# Allegro board VGroupV_PCB2.brd
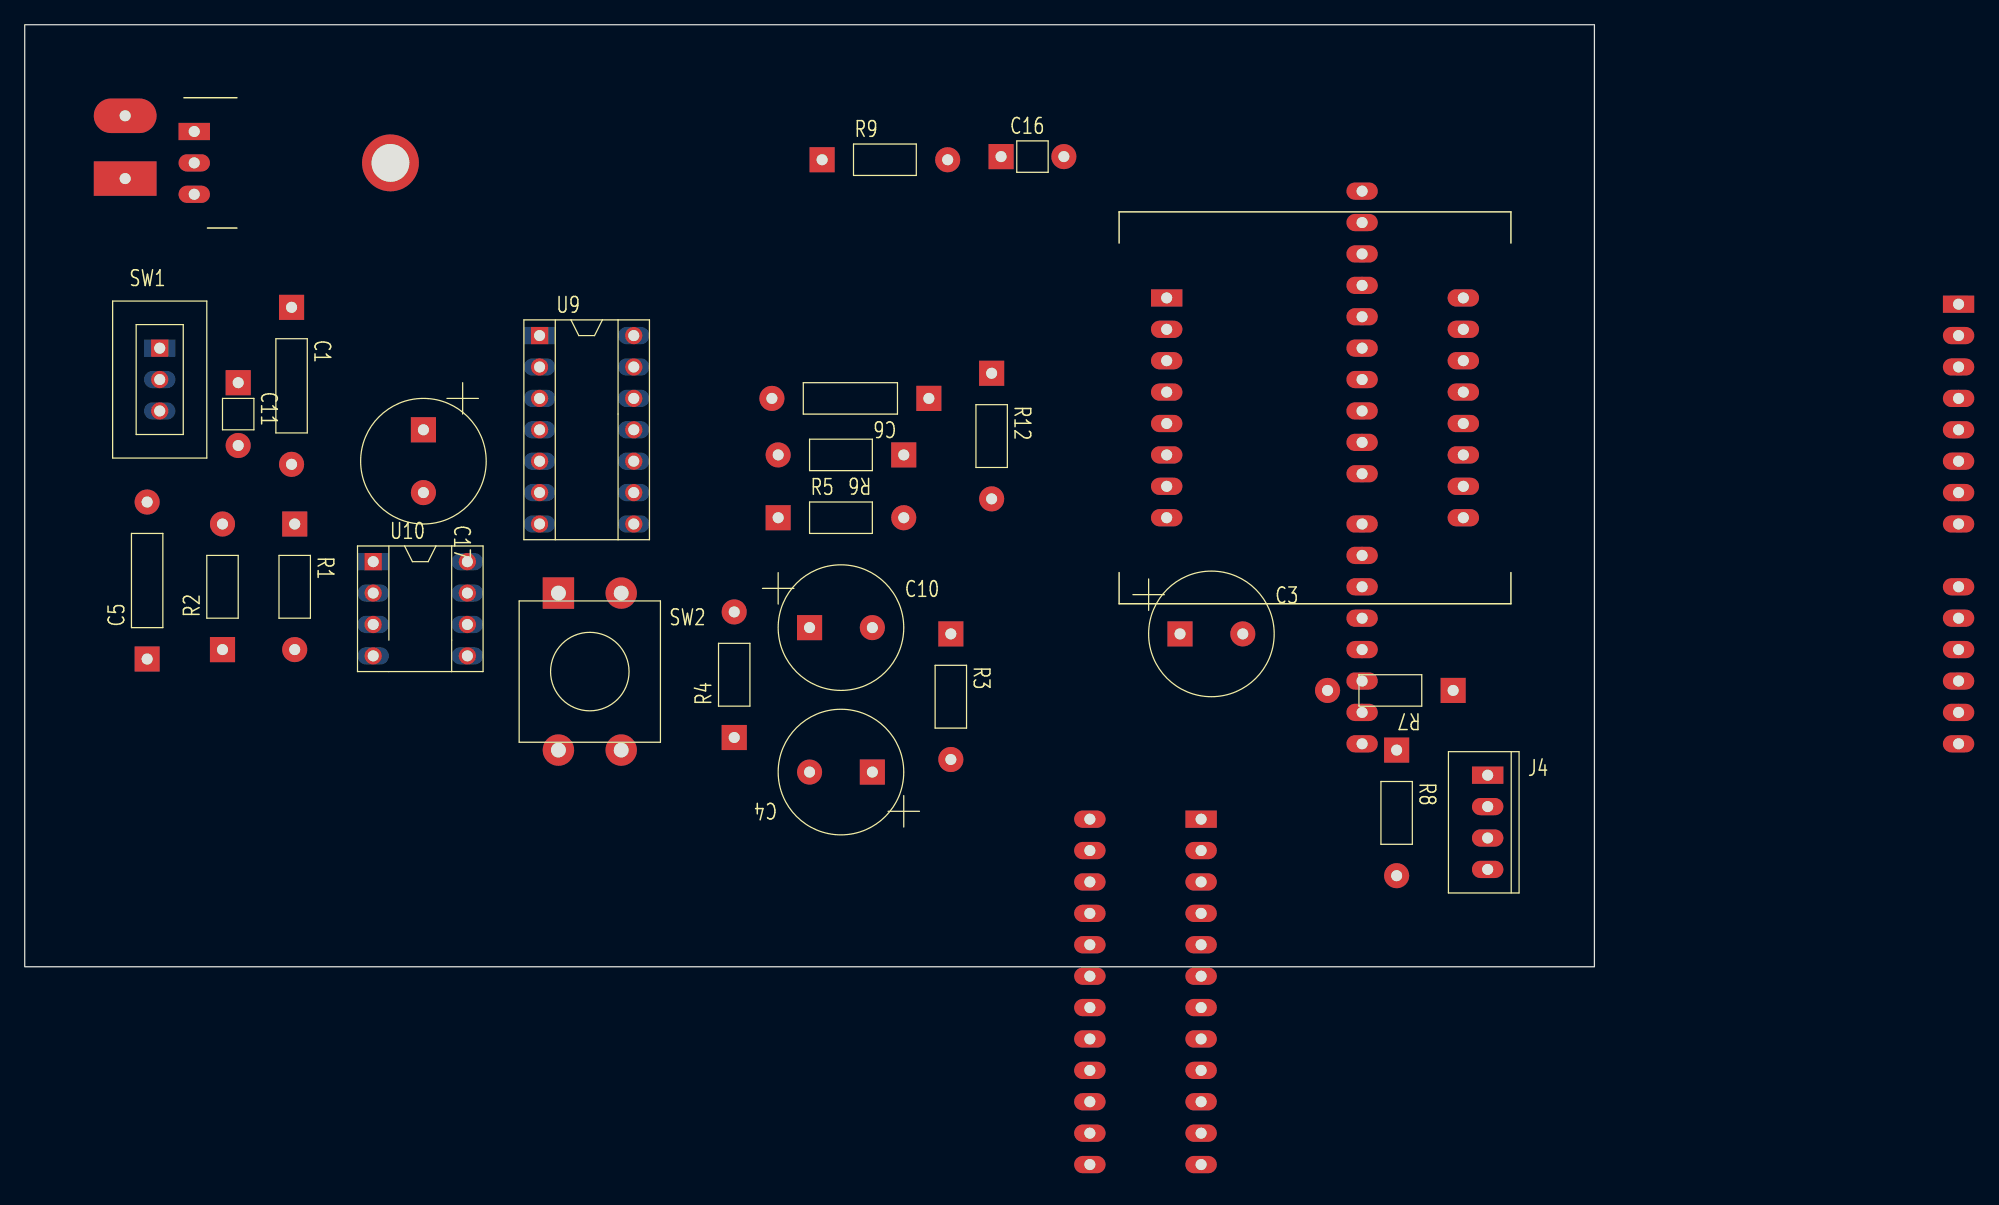
[diagram p0: board, top side]
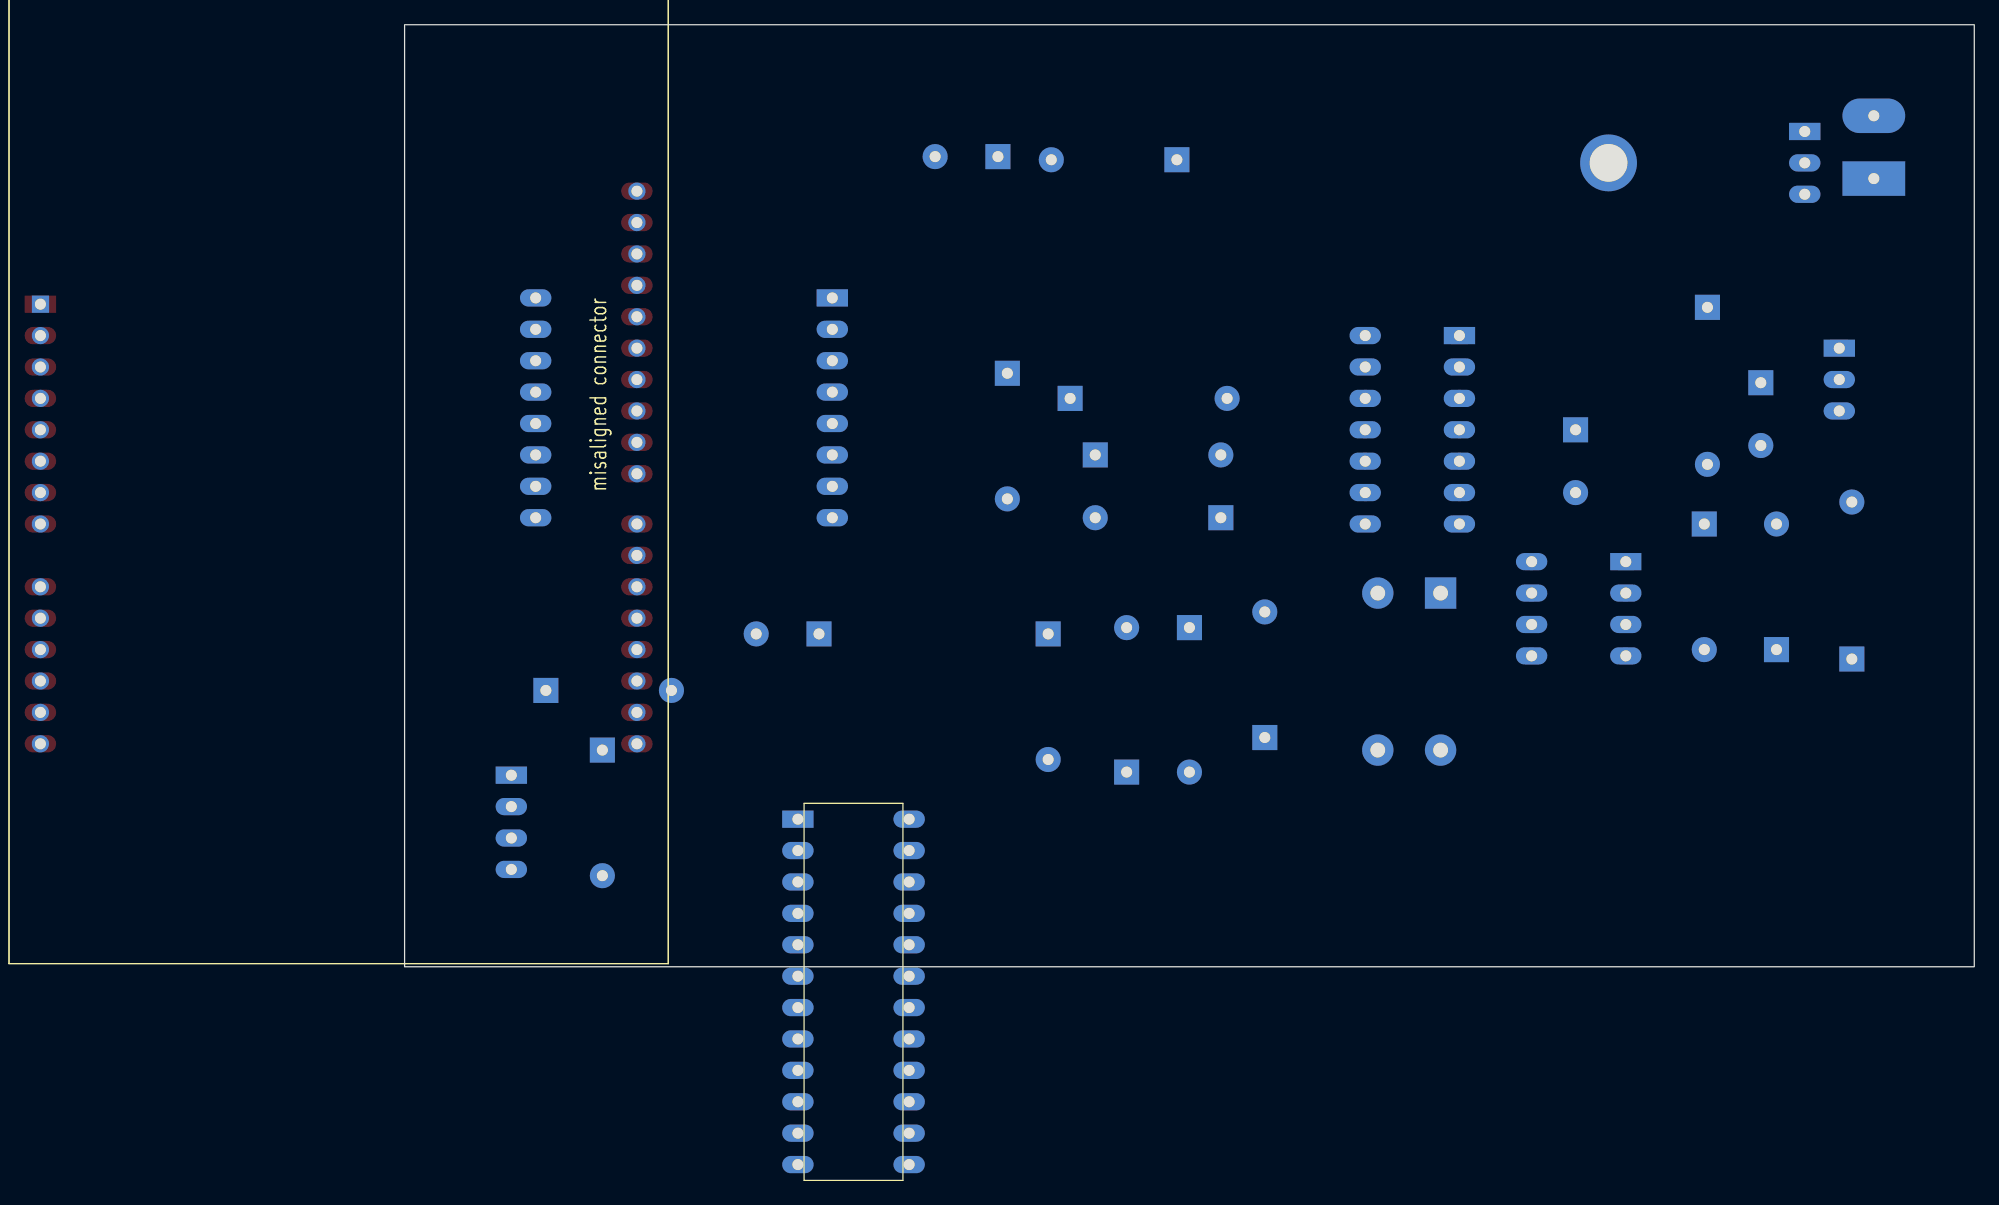
[diagram p1: board, bottom side, seen from below]

Outline 127 x 76.2 mm; copper layers: TOP, BOTTOM. Coordinates in mm from the lower left corner of the outline.
Outline path: rectangle 0,0 127,76.2

## Design rules (mm)
constraint set DEFAULT: min track width 0.508
nets with their own width: min track width 1.016; nets GND VCC

## Placement (name value [footprint] x y rotation side)
C1  1u  [GU-RC500]  21.59 53.34 270 top
C3  220U  [GU-CAPCYL200]  93.47 26.92 0 top
C4  220U  [GU-CAPCYL200]  68.58 15.75 180 top
C5  1n  [GU-RC500]  9.91 24.89 90 top
C6  1n  [GU-RC500]  73.15 45.97 180 top
C10  220u  [GU-CAPCYL200]  63.5 27.43 0 top
C11  0.1u  [GU-RC200]  17.27 47.24 270 top
C16  0.1u  [GU-RC200]  78.99 65.53 0 top
C17  10u  [GU-CAPCYL200]  32.26 43.43 270 top
DN1  LedArr-8x8  [8X8-LED-TRUOPTO]  104.39 45.21 270 top
J1  BATTERY 9V  [GU-TERMINAL2-200]  8.13 63.75 180 top
J4  CON4  [GU-MOLEX4]  118.36 15.49 0 top
R1  10k  [GU-RC400]  21.84 35.81 270 top
R2  50k  [GU-RC400]  16 25.65 90 top
R3  100k  [GU-RC400]  74.93 26.92 270 top
R4  100k  [GU-RC400]  57.4 18.54 90 top
R5  1k  [GU-RC400]  60.96 36.32 0 top
R6  50k  [GU-RC400]  71.12 41.4 180 top
R7  100  [GU-RC400]  115.57 22.35 180 top
R8  10k  [GU-RC400]  111 17.53 270 top
R9  30k  [GU-RC400]  64.52 65.28 0 top
R12  3k3  [GU-RC400]  78.23 48.01 270 top
SW1  SW_SL_SPDT  [GU-SW-SLIDE-SPDT]  10.92 50.04 0 top
SW2  SW PUSHBUTTON-SPST-2/SM  [GU-PUSH52]  43.18 30.23 0 top
U1  FRDM-KL25Z-Arduino  [GU-FRDM-ARDUINO]  156.46 53.59 180 bottom
U5  LM2937  [GU-LM2937]  13.72 67.56 0 top
U8  MAX7221  [GU-DIP24]  90.68 -2.03 180 bottom
U9  74HCT04  [GU-DIPSOCK14]  41.66 51.05 0 top
U10  MCP6292  [GU-DIPSOCK8]  28.19 32.77 0 top

## Library data of the parts
C1 C5 C6 = C
C3 C4 = C_elect_0
C10 C11 C16 C17 = CAPACITOR NON-POL
DN1 = LedArr-8x8
J1 = CON2: User Part Number: TERMINAL2-200
J4 = CON4
R1-R9 R12 = R
SW1 = SW_SL_SPDT
SW2 = SW PUSHBUTTON-SPST-2/SM_1
U1 = FRDM-KL25Z-Arduino
U5 = LM2937_0
U8 = MAX7221_7
U9 = 74HCT04
U10 = MCP6292

## Footprints (pads in the part's own frame, mm; a bottom-side part is the same pattern mirrored in y, then rotated)
8X8-LED-TRUOPTO
  rect 1.397x2.54 hole 0.889: 1(-8.89,-12)
  oval 1.397x2.54 hole 0.889: 2(-6.35,-12) 3(-3.81,-12) 4(-1.27,-12) 5(1.27,-12) 6(3.81,-12) 7(6.35,-12) 8(8.89,-12) 9(8.89,12) 10(6.35,12) 11(3.81,12) 12(1.27,12) 13(-1.27,12) 14(-3.81,12) 15(-6.35,12) 16(-8.89,12)
GU-CAPCYL200
  rect 2.032x2.032 hole 0.889: 1(0,0)
  round 2.032 hole 0.889: 2(5.08,0)
GU-DIP24
  rect 2.54x1.397 hole 0.889: 1(-4.5,13.97)
  oval 2.54x1.397 hole 0.889: 2(-4.5,11.43) 3(-4.5,8.89) 4(-4.5,6.35) 5(-4.5,3.81) 6(-4.5,1.27) 7(-4.5,-1.27) 8(-4.5,-3.81) 9(-4.5,-6.35) 10(-4.5,-8.89) 11(-4.5,-11.43) 12(-4.5,-13.97) 13(4.5,-13.97) 14(4.5,-11.43) 15(4.5,-8.89) 16(4.5,-6.35) 17(4.5,-3.81) 18(4.5,-1.27) 19(4.5,1.27) 20(4.5,3.81) 21(4.5,6.35) 22(4.5,8.89) 23(4.5,11.43) 24(4.5,13.97)
GU-DIPSOCK8
  rect 1.397x1.397 hole 0.889: 1(0,0)
  round 1.397 hole 0.889: 2(0,-2.54) 3(0,-5.08) 4(0,-7.62) 5(7.62,-7.62) 6(7.62,-5.08) 7(7.62,-2.54) 8(7.62,0)
GU-DIPSOCK14
  rect 1.397x1.397 hole 0.889: 1(0,0)
  round 1.397 hole 0.889: 2(0,-2.54) 3(0,-5.08) 4(0,-7.62) 5(0,-10.16) 6(0,-12.7) 7(0,-15.24) 8(7.62,-15.24) 9(7.62,-12.7) 10(7.62,-10.16) 11(7.62,-7.62) 12(7.62,-5.08) 13(7.62,-2.54) 14(7.62,0)
GU-FRDM-ARDUINO
  rect 2.54x1.397 hole 0.889: 1(0,0)
  oval 2.54x1.397 hole 0.889: 2(0,-2.54) 3(0,-5.08) 4(0,-7.62) 5(0,-10.16) 6(0,-12.7) 7(0,-15.24) 8(0,-17.78) 9(0,-22.86) 10(0,-25.4) 11(0,-27.94) 12(0,-30.48) 13(0,-33.02) 14(0,-35.56) 15(48.26,-35.56) 16(48.26,-33.02) 17(48.26,-30.48) 18(48.26,-27.94) 19(48.26,-25.4) 20(48.26,-22.86) 21(48.26,-20.32) 22(48.26,-17.78) 23(48.26,-13.716) 24(48.26,-11.176) 25(48.26,-8.636) 26(48.26,-6.096) 27(48.26,-3.556) 28(48.26,-1.016) 29(48.26,1.524) 30(48.26,4.064) 31(48.26,6.604) 32(48.26,9.144)
GU-LM2937
  rect 2.54x1.397 hole 0.889: 1(0,0)
  oval 2.54x1.397 hole 0.889: 2(0,-2.54) 3(0,-5.08)
  round 4.6 hole 3.05: 4(15.875,-2.54)
GU-MOLEX4
  rect 2.54x1.397 hole 0.889: 1(0,0)
  oval 2.54x1.397 hole 0.889: 2(0,-2.54) 3(0,-5.08) 4(0,-7.62)
GU-PUSH52
  rect 2.54x2.54 hole 1.194: 1(0,0)
  round 2.54 hole 1.194: 2(5.08,0) 3(0,-12.7) 4(5.08,-12.7)
GU-RC200
  rect 2.032x2.032 hole 0.889: 1(0,0)
  round 2.032 hole 0.889: 2(5.08,0)
GU-RC400
  rect 2.032x2.032 hole 0.889: 1(0,0)
  round 2.032 hole 0.889: 2(10.16,0)
GU-RC500
  rect 2.032x2.032 hole 0.889: 1(0,0)
  round 2.032 hole 0.889: 2(12.7,0)
GU-SW-SLIDE-SPDT
  rect 1.397x1.397 hole 0.889: 1(0,0)
  round 1.397 hole 0.889: 2(0,-2.54) 3(0,-5.08)
GU-TERMINAL2-200
  rect 5.08x2.794 hole 0.889: 1(0,0)
  oval 5.08x2.794 hole 0.889: 2(0,-5.08)

## Nets
3V3: C4.1 R3.2 R7.2 R8.2 SW2.1(4) U1.2 U1.4 U10.8
GND: C3.2(-) C4.2(-) C10.2 C11.2 C16.2 C17.2 J1.2 J4.1 J4.3 R4.1 R12.1 U1.6 U1.7 U1.29 U5.2 U5.4 U8.4 U8.9 U9.7 U10.4
VCC: C10.1 C16.1 C17.1 R9.2 U1.8 U5.3(OUT) U8.19(VCC) U9.14
VIN: C1.1 J4.2 R8.1
CS: U8.12 U9.8
LOAD: U1.25 U9.5
MOSI: U1.26 U9.1
SCLK: U1.28 U8.13 U9.3 U9.10
SDI: U8.1 U9.12(Y)
VOUT: C6.2 R6.2 U1.9 U10.7(OUT)
VREF: C3.1 R3.1 R4.2 U10.3 U10.5
N08137: C5.1 R1.2 R2.1 U10.2
N08145: C5.2 R2.2 R5.1 U10.1
N08157: C6.1 R5.2 R6.1 U10.6
N08433: C1.2 R1.1
N10280: J4.4 R7.1
N13184: U9.4 U9.11
N13188: U9.2 U9.13
N13195: U9.6 U9.9
N25169: DN1.16 U8.17
N25451: DN1.13 U8.22
N25464: DN1.3 U8.14
N25471: DN1.4 U8.16
N25478: DN1.10 U8.20
N25485: DN1.6 U8.23
N25492: DN1.11 U8.21
N25499: DN1.15 U8.15
N28309: J1.1 SW1.1
N28319: C11.1 SW1.2 U5.1
N29244: R12.2 SW2.2 U1.17
N68469: R9.1 U8.18
N1135613: DN1.9 U8.2
N1135614: DN1.14 U8.11
N1135615: DN1.8 U8.6
N1135616: DN1.12 U8.7
N1135617: DN1.1 U8.3
N1135618: DN1.7 U8.10
N1135619: DN1.2 U8.5
N1135620: DN1.5(RA8) U8.8

Pads without a net: SW1 3; SW2 3 4; U1 1 3 5 10 11 12 13 14 15 16 18 19 20 21 22 23 24 27 30 31 32; U8 24
